# EAGLE board SparkFun_ACS712_Low_Current_Sensor_Panel_v14 (EAGLE 7.4.0), part 1 of 4
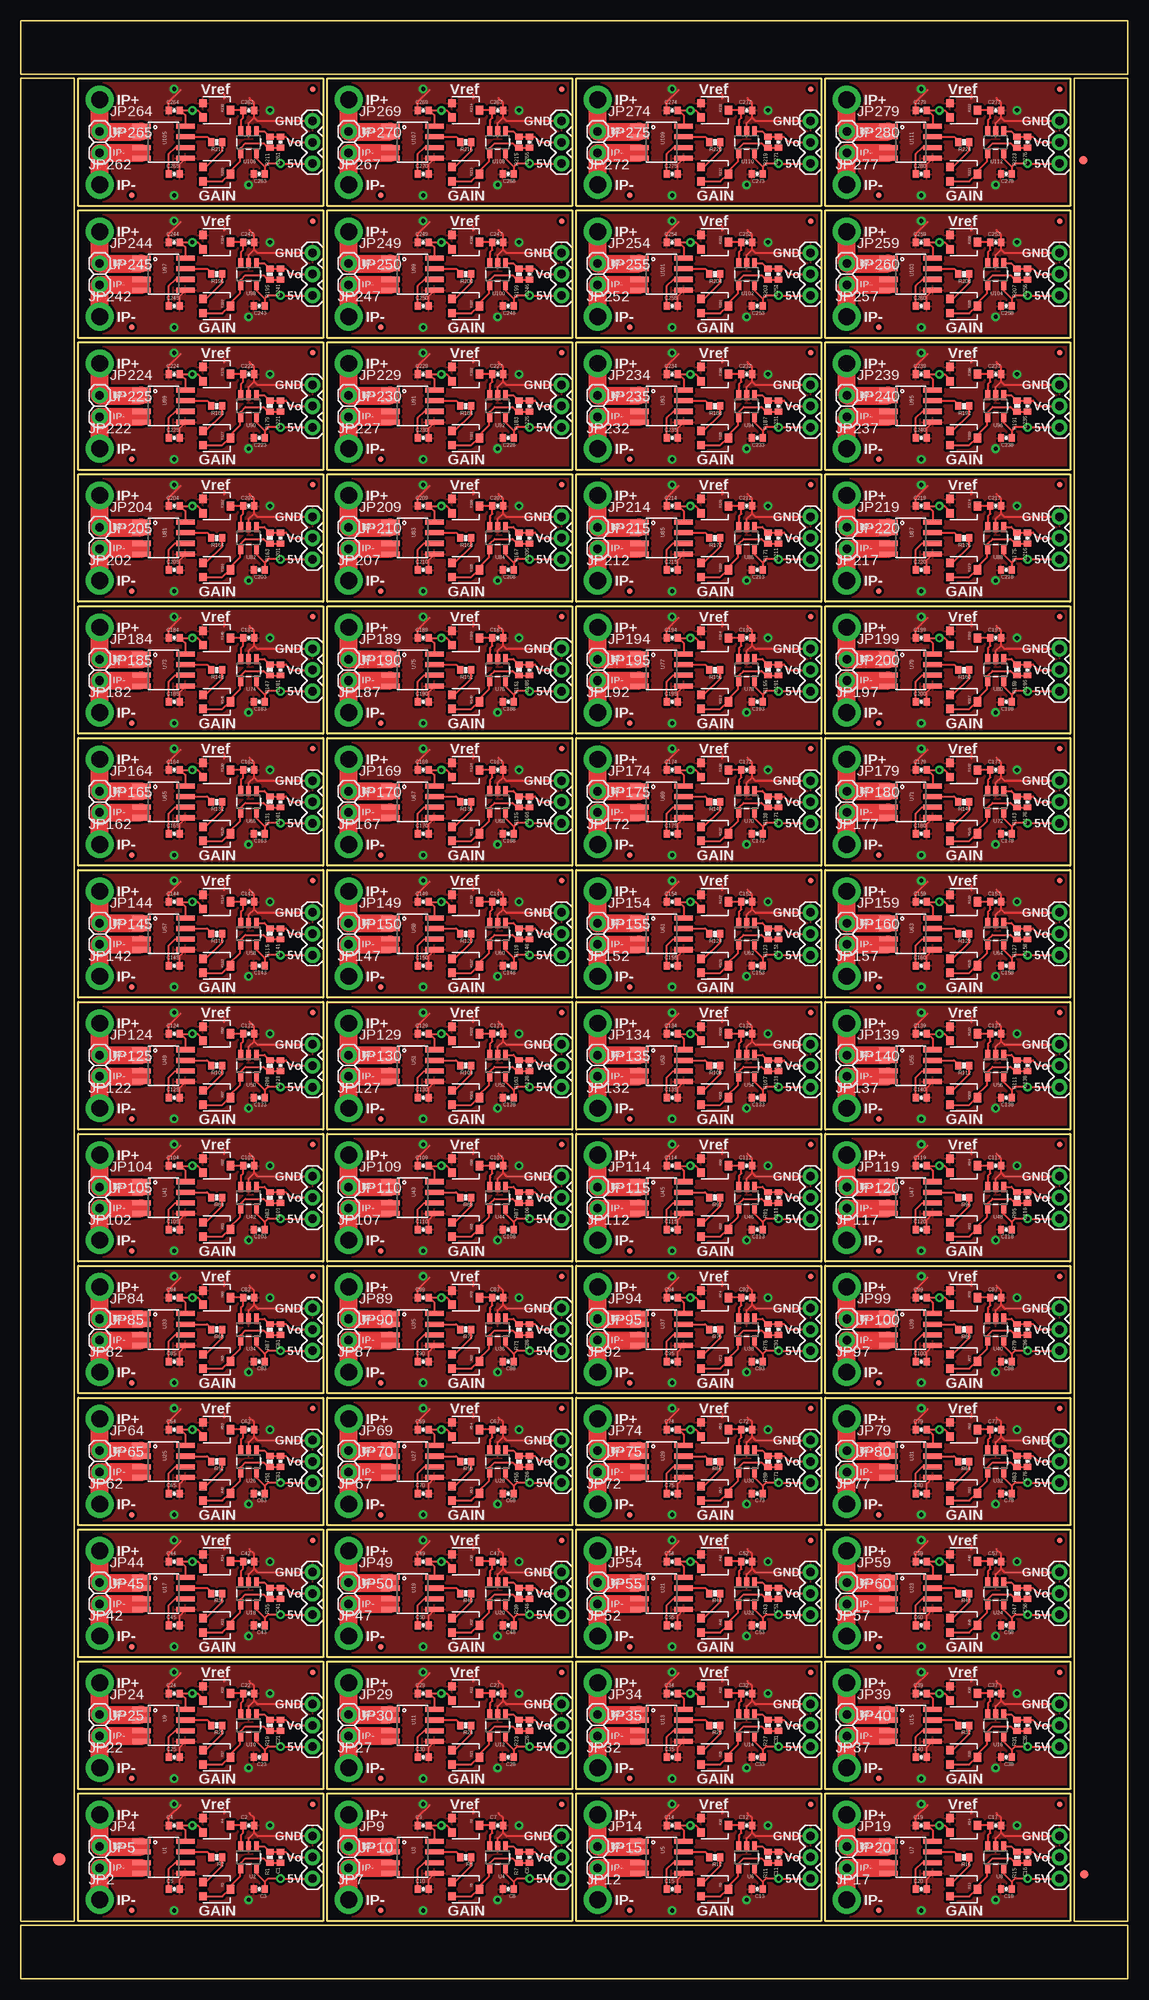
[diagram p0: board, top side]
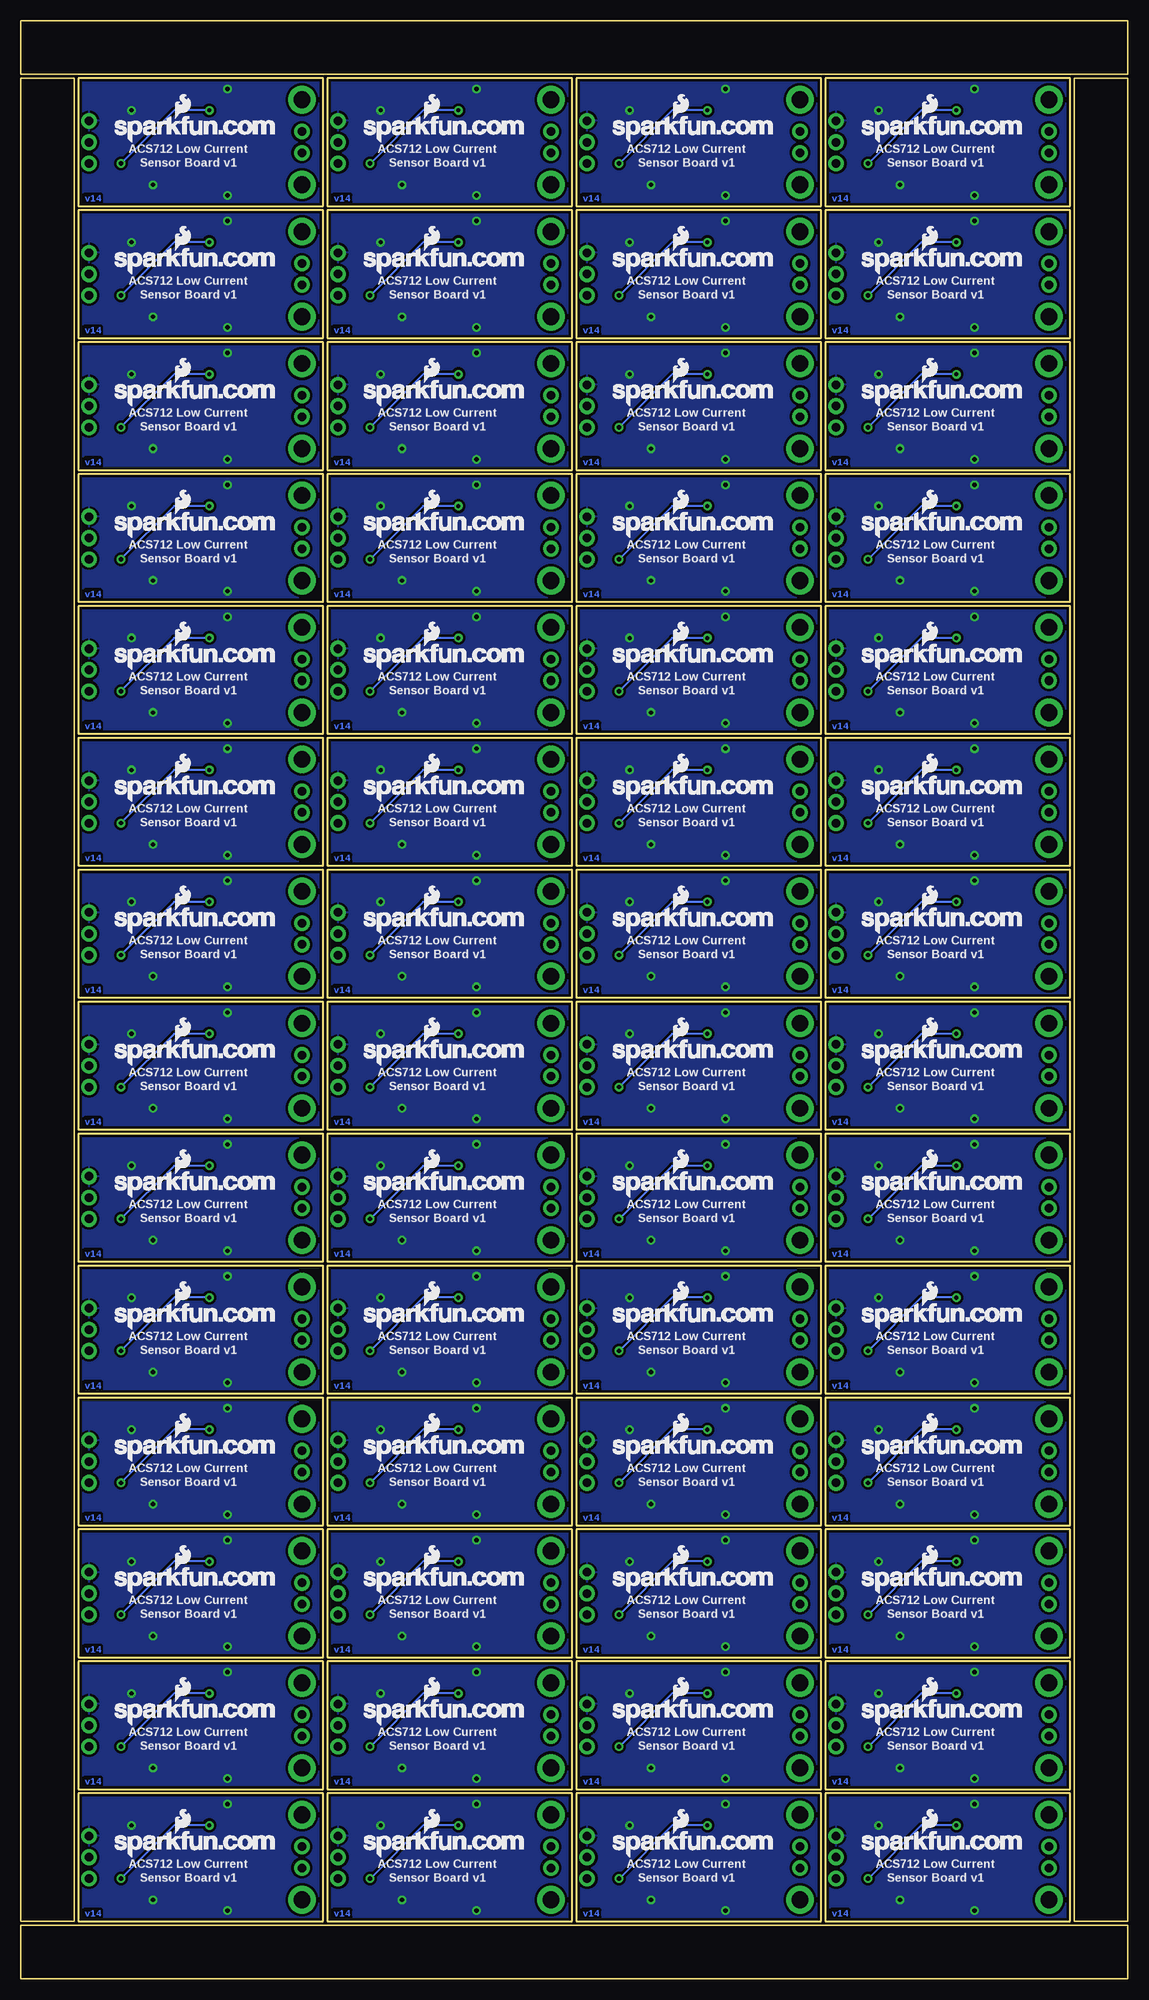
[diagram p1: board, bottom side, seen from below]

Size 132.08 x 233.68 mm. Coordinates in mm from the lower left corner, seen from the top.
Outline: 248 segments
Copper layers (1*16): Top 0.035mm / dielectric 1.5mm / Bottom 0.035mm
Design rules "default": minimum track width 8mil, minimum drill 20mil, track to track 8mil, track to pad 8mil, pad to pad 8mil, via to via 8mil, smd to smd 8mil, copper to edge 8mil, drill to drill 8mil, minimum pad ring 12mil, minimum via ring 10mil, stop-mask expansion 4mil, vias tented up to drill 20mil, thermal gap 10mil

## Footprints (pad centres in the part's own frame; a part is rotated, then mirrored left to right if it is on the bottom)
0402-CAP = smd 0.7 x 0.9: 1 -0.65,0; 2 0.65,0
FIDUCIAL-1.5X3 = smd 1.5 x 1.5: 1 0,0
FIDUCIAL-1X2 = smd 1 x 1: 1 0,0
1X01_2MM = drill 2 pad 3.302: 1 0,0
1X03 = drill 1.016 pad 1.88: 1 0,0; 2 2.54,0; 3 5.08,0
1X01 = drill 1.016 pad 1.88: 1 0,0
0402-RES = smd 0.7 x 0.9: 1 -0.65,0; 2 0.65,0
TRIMPOT-3MM = smd 1 x 0.9: 1 -0.85,-1.65; 3 0.85,-1.65 | smd 1.1 x 0.9: 2 0,1.65
SO08 = smd 0.61 x 2.21: 1 -1.905,-2.616; 2 -0.635,-2.616; 3 0.635,-2.616; 4 1.905,-2.616; 5 1.905,2.616; 6 0.635,2.616; 7 -0.635,2.616; 8 -1.905,2.616
SOT23-5 = smd 0.55 x 1.2: 1 -0.95,-1.3; 2 0,-1.3; 3 0.95,-1.3; 4 0.95,1.3; 5 -0.95,1.3
MICRO-FIDUCIAL = smd 0.635 x 0.635: 1 0,0

## Placement (x,y rotation side)
C1  0.1uF  [0402-CAP]  30.99,14.48 270 top
C2  0.1uF  [0402-CAP]  27.18,18.29 0 top
C3  0.1uF  [0402-CAP]  28.45,10.67 180 top
C4  0.1uF  [0402-CAP]  18.29,18.29 0 top
C5  1nF  [0402-CAP]  18.29,10.67 0 top
C6  0.1uF  [0402-CAP]  60.71,14.48 270 top
C7  0.1uF  [0402-CAP]  56.9,18.29 0 top
C8  0.1uF  [0402-CAP]  58.17,10.67 180 top
C9  0.1uF  [0402-CAP]  48.01,18.29 0 top
C10  1nF  [0402-CAP]  48.01,10.67 0 top
C11  0.1uF  [0402-CAP]  90.42,14.48 270 top
C12  0.1uF  [0402-CAP]  86.61,18.29 0 top
C13  0.1uF  [0402-CAP]  87.88,10.67 180 top
C14  0.1uF  [0402-CAP]  77.72,18.29 0 top
C15  1nF  [0402-CAP]  77.72,10.67 0 top
C16  0.1uF  [0402-CAP]  120.14,14.48 270 top
C17  0.1uF  [0402-CAP]  116.33,18.29 0 top
C18  0.1uF  [0402-CAP]  117.6,10.67 180 top
C19  0.1uF  [0402-CAP]  107.44,18.29 0 top
C20  1nF  [0402-CAP]  107.44,10.67 0 top
C21  0.1uF  [0402-CAP]  30.99,30.23 270 top
C22  0.1uF  [0402-CAP]  27.18,34.04 0 top
C23  0.1uF  [0402-CAP]  28.45,26.42 180 top
C24  0.1uF  [0402-CAP]  18.29,34.04 0 top
C25  1nF  [0402-CAP]  18.29,26.42 0 top
C26  0.1uF  [0402-CAP]  60.71,30.23 270 top
C27  0.1uF  [0402-CAP]  56.9,34.04 0 top
C28  0.1uF  [0402-CAP]  58.17,26.42 180 top
C29  0.1uF  [0402-CAP]  48.01,34.04 0 top
C30  1nF  [0402-CAP]  48.01,26.42 0 top
C31  0.1uF  [0402-CAP]  90.42,30.23 270 top
C32  0.1uF  [0402-CAP]  86.61,34.04 0 top
C33  0.1uF  [0402-CAP]  87.88,26.42 180 top
C34  0.1uF  [0402-CAP]  77.72,34.04 0 top
C35  1nF  [0402-CAP]  77.72,26.42 0 top
C36  0.1uF  [0402-CAP]  120.14,30.23 270 top
C37  0.1uF  [0402-CAP]  116.33,34.04 0 top
C38  0.1uF  [0402-CAP]  117.6,26.42 180 top
C39  0.1uF  [0402-CAP]  107.44,34.04 0 top
C40  1nF  [0402-CAP]  107.44,26.42 0 top
C41  0.1uF  [0402-CAP]  30.99,45.97 270 top
C42  0.1uF  [0402-CAP]  27.18,49.78 0 top
C43  0.1uF  [0402-CAP]  28.45,42.16 180 top
C44  0.1uF  [0402-CAP]  18.29,49.78 0 top
C45  1nF  [0402-CAP]  18.29,42.16 0 top
C46  0.1uF  [0402-CAP]  60.71,45.97 270 top
C47  0.1uF  [0402-CAP]  56.9,49.78 0 top
C48  0.1uF  [0402-CAP]  58.17,42.16 180 top
C49  0.1uF  [0402-CAP]  48.01,49.78 0 top
C50  1nF  [0402-CAP]  48.01,42.16 0 top
C51  0.1uF  [0402-CAP]  90.42,45.97 270 top
C52  0.1uF  [0402-CAP]  86.61,49.78 0 top
C53  0.1uF  [0402-CAP]  87.88,42.16 180 top
C54  0.1uF  [0402-CAP]  77.72,49.78 0 top
C55  1nF  [0402-CAP]  77.72,42.16 0 top
C56  0.1uF  [0402-CAP]  120.14,45.97 270 top
C57  0.1uF  [0402-CAP]  116.33,49.78 0 top
C58  0.1uF  [0402-CAP]  117.6,42.16 180 top
C59  0.1uF  [0402-CAP]  107.44,49.78 0 top
C60  1nF  [0402-CAP]  107.44,42.16 0 top
C61  0.1uF  [0402-CAP]  30.99,61.72 270 top
C62  0.1uF  [0402-CAP]  27.18,65.53 0 top
C63  0.1uF  [0402-CAP]  28.45,57.91 180 top
C64  0.1uF  [0402-CAP]  18.29,65.53 0 top
C65  1nF  [0402-CAP]  18.29,57.91 0 top
C66  0.1uF  [0402-CAP]  60.71,61.72 270 top
C67  0.1uF  [0402-CAP]  56.9,65.53 0 top
C68  0.1uF  [0402-CAP]  58.17,57.91 180 top
C69  0.1uF  [0402-CAP]  48.01,65.53 0 top
C70  1nF  [0402-CAP]  48.01,57.91 0 top
C71  0.1uF  [0402-CAP]  90.42,61.72 270 top
C72  0.1uF  [0402-CAP]  86.61,65.53 0 top
C73  0.1uF  [0402-CAP]  87.88,57.91 180 top
C74  0.1uF  [0402-CAP]  77.72,65.53 0 top
C75  1nF  [0402-CAP]  77.72,57.91 0 top
C76  0.1uF  [0402-CAP]  120.14,61.72 270 top
C77  0.1uF  [0402-CAP]  116.33,65.53 0 top
C78  0.1uF  [0402-CAP]  117.6,57.91 180 top
C79  0.1uF  [0402-CAP]  107.44,65.53 0 top
C80  1nF  [0402-CAP]  107.44,57.91 0 top
C81  0.1uF  [0402-CAP]  30.99,77.47 270 top
C82  0.1uF  [0402-CAP]  27.18,81.28 0 top
C83  0.1uF  [0402-CAP]  28.45,73.66 180 top
C84  0.1uF  [0402-CAP]  18.29,81.28 0 top
C85  1nF  [0402-CAP]  18.29,73.66 0 top
C86  0.1uF  [0402-CAP]  60.71,77.47 270 top
C87  0.1uF  [0402-CAP]  56.9,81.28 0 top
C88  0.1uF  [0402-CAP]  58.17,73.66 180 top
C89  0.1uF  [0402-CAP]  48.01,81.28 0 top
C90  1nF  [0402-CAP]  48.01,73.66 0 top
C91  0.1uF  [0402-CAP]  90.42,77.47 270 top
C92  0.1uF  [0402-CAP]  86.61,81.28 0 top
C93  0.1uF  [0402-CAP]  87.88,73.66 180 top
C94  0.1uF  [0402-CAP]  77.72,81.28 0 top
C95  1nF  [0402-CAP]  77.72,73.66 0 top
C96  0.1uF  [0402-CAP]  120.14,77.47 270 top
C97  0.1uF  [0402-CAP]  116.33,81.28 0 top
C98  0.1uF  [0402-CAP]  117.6,73.66 180 top
C99  0.1uF  [0402-CAP]  107.44,81.28 0 top
C100  1nF  [0402-CAP]  107.44,73.66 0 top
C101  0.1uF  [0402-CAP]  30.99,93.22 270 top
C102  0.1uF  [0402-CAP]  27.18,97.03 0 top
C103  0.1uF  [0402-CAP]  28.45,89.41 180 top
C104  0.1uF  [0402-CAP]  18.29,97.03 0 top
C105  1nF  [0402-CAP]  18.29,89.41 0 top
C106  0.1uF  [0402-CAP]  60.71,93.22 270 top
C107  0.1uF  [0402-CAP]  56.9,97.03 0 top
C108  0.1uF  [0402-CAP]  58.17,89.41 180 top
C109  0.1uF  [0402-CAP]  48.01,97.03 0 top
C110  1nF  [0402-CAP]  48.01,89.41 0 top
C111  0.1uF  [0402-CAP]  90.42,93.22 270 top
C112  0.1uF  [0402-CAP]  86.61,97.03 0 top
C113  0.1uF  [0402-CAP]  87.88,89.41 180 top
C114  0.1uF  [0402-CAP]  77.72,97.03 0 top
C115  1nF  [0402-CAP]  77.72,89.41 0 top
C116  0.1uF  [0402-CAP]  120.14,93.22 270 top
C117  0.1uF  [0402-CAP]  116.33,97.03 0 top
C118  0.1uF  [0402-CAP]  117.6,89.41 180 top
C119  0.1uF  [0402-CAP]  107.44,97.03 0 top
C120  1nF  [0402-CAP]  107.44,89.41 0 top
C121  0.1uF  [0402-CAP]  30.99,108.97 270 top
C122  0.1uF  [0402-CAP]  27.18,112.78 0 top
C123  0.1uF  [0402-CAP]  28.45,105.16 180 top
C124  0.1uF  [0402-CAP]  18.29,112.78 0 top
C125  1nF  [0402-CAP]  18.29,105.16 0 top
C126  0.1uF  [0402-CAP]  60.71,108.97 270 top
C127  0.1uF  [0402-CAP]  56.9,112.78 0 top
C128  0.1uF  [0402-CAP]  58.17,105.16 180 top
C129  0.1uF  [0402-CAP]  48.01,112.78 0 top
C130  1nF  [0402-CAP]  48.01,105.16 0 top
C131  0.1uF  [0402-CAP]  90.42,108.97 270 top
C132  0.1uF  [0402-CAP]  86.61,112.78 0 top
C133  0.1uF  [0402-CAP]  87.88,105.16 180 top
C134  0.1uF  [0402-CAP]  77.72,112.78 0 top
C135  1nF  [0402-CAP]  77.72,105.16 0 top
C136  0.1uF  [0402-CAP]  120.14,108.97 270 top
C137  0.1uF  [0402-CAP]  116.33,112.78 0 top
C138  0.1uF  [0402-CAP]  117.6,105.16 180 top
C139  0.1uF  [0402-CAP]  107.44,112.78 0 top
C140  1nF  [0402-CAP]  107.44,105.16 0 top
C141  0.1uF  [0402-CAP]  30.99,124.71 270 top
C142  0.1uF  [0402-CAP]  27.18,128.52 0 top
C143  0.1uF  [0402-CAP]  28.45,120.9 180 top
C144  0.1uF  [0402-CAP]  18.29,128.52 0 top
C145  1nF  [0402-CAP]  18.29,120.9 0 top
C146  0.1uF  [0402-CAP]  60.71,124.71 270 top
C147  0.1uF  [0402-CAP]  56.9,128.52 0 top
C148  0.1uF  [0402-CAP]  58.17,120.9 180 top
C149  0.1uF  [0402-CAP]  48.01,128.52 0 top
C150  1nF  [0402-CAP]  48.01,120.9 0 top
C151  0.1uF  [0402-CAP]  90.42,124.71 270 top
C152  0.1uF  [0402-CAP]  86.61,128.52 0 top
C153  0.1uF  [0402-CAP]  87.88,120.9 180 top
C154  0.1uF  [0402-CAP]  77.72,128.52 0 top
C155  1nF  [0402-CAP]  77.72,120.9 0 top
C156  0.1uF  [0402-CAP]  120.14,124.71 270 top
C157  0.1uF  [0402-CAP]  116.33,128.52 0 top
C158  0.1uF  [0402-CAP]  117.6,120.9 180 top
C159  0.1uF  [0402-CAP]  107.44,128.52 0 top
C160  1nF  [0402-CAP]  107.44,120.9 0 top
C161  0.1uF  [0402-CAP]  30.99,140.46 270 top
C162  0.1uF  [0402-CAP]  27.18,144.27 0 top
C163  0.1uF  [0402-CAP]  28.45,136.65 180 top
C164  0.1uF  [0402-CAP]  18.29,144.27 0 top
C165  1nF  [0402-CAP]  18.29,136.65 0 top
C166  0.1uF  [0402-CAP]  60.71,140.46 270 top
C167  0.1uF  [0402-CAP]  56.9,144.27 0 top
C168  0.1uF  [0402-CAP]  58.17,136.65 180 top
C169  0.1uF  [0402-CAP]  48.01,144.27 0 top
C170  1nF  [0402-CAP]  48.01,136.65 0 top
C171  0.1uF  [0402-CAP]  90.42,140.46 270 top
C172  0.1uF  [0402-CAP]  86.61,144.27 0 top
C173  0.1uF  [0402-CAP]  87.88,136.65 180 top
C174  0.1uF  [0402-CAP]  77.72,144.27 0 top
C175  1nF  [0402-CAP]  77.72,136.65 0 top
C176  0.1uF  [0402-CAP]  120.14,140.46 270 top
C177  0.1uF  [0402-CAP]  116.33,144.27 0 top
C178  0.1uF  [0402-CAP]  117.6,136.65 180 top
C179  0.1uF  [0402-CAP]  107.44,144.27 0 top
C180  1nF  [0402-CAP]  107.44,136.65 0 top
C181  0.1uF  [0402-CAP]  30.99,156.21 270 top
C182  0.1uF  [0402-CAP]  27.18,160.02 0 top
C183  0.1uF  [0402-CAP]  28.45,152.4 180 top
C184  0.1uF  [0402-CAP]  18.29,160.02 0 top
C185  1nF  [0402-CAP]  18.29,152.4 0 top
C186  0.1uF  [0402-CAP]  60.71,156.21 270 top
C187  0.1uF  [0402-CAP]  56.9,160.02 0 top
C188  0.1uF  [0402-CAP]  58.17,152.4 180 top
C189  0.1uF  [0402-CAP]  48.01,160.02 0 top
C190  1nF  [0402-CAP]  48.01,152.4 0 top
C191  0.1uF  [0402-CAP]  90.42,156.21 270 top
C192  0.1uF  [0402-CAP]  86.61,160.02 0 top
C193  0.1uF  [0402-CAP]  87.88,152.4 180 top
C194  0.1uF  [0402-CAP]  77.72,160.02 0 top
C195  1nF  [0402-CAP]  77.72,152.4 0 top
C196  0.1uF  [0402-CAP]  120.14,156.21 270 top
C197  0.1uF  [0402-CAP]  116.33,160.02 0 top
C198  0.1uF  [0402-CAP]  117.6,152.4 180 top
C199  0.1uF  [0402-CAP]  107.44,160.02 0 top
C200  1nF  [0402-CAP]  107.44,152.4 0 top
C201  0.1uF  [0402-CAP]  30.99,171.96 270 top
C202  0.1uF  [0402-CAP]  27.18,175.77 0 top
C203  0.1uF  [0402-CAP]  28.45,168.15 180 top
C204  0.1uF  [0402-CAP]  18.29,175.77 0 top
C205  1nF  [0402-CAP]  18.29,168.15 0 top
C206  0.1uF  [0402-CAP]  60.71,171.96 270 top
C207  0.1uF  [0402-CAP]  56.9,175.77 0 top
C208  0.1uF  [0402-CAP]  58.17,168.15 180 top
C209  0.1uF  [0402-CAP]  48.01,175.77 0 top
C210  1nF  [0402-CAP]  48.01,168.15 0 top
C211  0.1uF  [0402-CAP]  90.42,171.96 270 top
C212  0.1uF  [0402-CAP]  86.61,175.77 0 top
C213  0.1uF  [0402-CAP]  87.88,168.15 180 top
C214  0.1uF  [0402-CAP]  77.72,175.77 0 top
C215  1nF  [0402-CAP]  77.72,168.15 0 top
C216  0.1uF  [0402-CAP]  120.14,171.96 270 top
C217  0.1uF  [0402-CAP]  116.33,175.77 0 top
C218  0.1uF  [0402-CAP]  117.6,168.15 180 top
C219  0.1uF  [0402-CAP]  107.44,175.77 0 top
C220  1nF  [0402-CAP]  107.44,168.15 0 top
C221  0.1uF  [0402-CAP]  30.99,187.71 270 top
C222  0.1uF  [0402-CAP]  27.18,191.52 0 top
C223  0.1uF  [0402-CAP]  28.45,183.9 180 top
C224  0.1uF  [0402-CAP]  18.29,191.52 0 top
C225  1nF  [0402-CAP]  18.29,183.9 0 top
C226  0.1uF  [0402-CAP]  60.71,187.71 270 top
C227  0.1uF  [0402-CAP]  56.9,191.52 0 top
C228  0.1uF  [0402-CAP]  58.17,183.9 180 top
C229  0.1uF  [0402-CAP]  48.01,191.52 0 top
C230  1nF  [0402-CAP]  48.01,183.9 0 top
C231  0.1uF  [0402-CAP]  90.42,187.71 270 top
C232  0.1uF  [0402-CAP]  86.61,191.52 0 top
C233  0.1uF  [0402-CAP]  87.88,183.9 180 top
C234  0.1uF  [0402-CAP]  77.72,191.52 0 top
C235  1nF  [0402-CAP]  77.72,183.9 0 top
C236  0.1uF  [0402-CAP]  120.14,187.71 270 top
C237  0.1uF  [0402-CAP]  116.33,191.52 0 top
C238  0.1uF  [0402-CAP]  117.6,183.9 180 top
C239  0.1uF  [0402-CAP]  107.44,191.52 0 top
C240  1nF  [0402-CAP]  107.44,183.9 0 top
C241  0.1uF  [0402-CAP]  30.99,203.45 270 top
C242  0.1uF  [0402-CAP]  27.18,207.26 0 top
C243  0.1uF  [0402-CAP]  28.45,199.64 180 top
C244  0.1uF  [0402-CAP]  18.29,207.26 0 top
C245  1nF  [0402-CAP]  18.29,199.64 0 top
C246  0.1uF  [0402-CAP]  60.71,203.45 270 top
C247  0.1uF  [0402-CAP]  56.9,207.26 0 top
C248  0.1uF  [0402-CAP]  58.17,199.64 180 top
C249  0.1uF  [0402-CAP]  48.01,207.26 0 top
C250  1nF  [0402-CAP]  48.01,199.64 0 top
C251  0.1uF  [0402-CAP]  90.42,203.45 270 top
C252  0.1uF  [0402-CAP]  86.61,207.26 0 top
C253  0.1uF  [0402-CAP]  87.88,199.64 180 top
C254  0.1uF  [0402-CAP]  77.72,207.26 0 top
C255  1nF  [0402-CAP]  77.72,199.64 0 top
C256  0.1uF  [0402-CAP]  120.14,203.45 270 top
C257  0.1uF  [0402-CAP]  116.33,207.26 0 top
C258  0.1uF  [0402-CAP]  117.6,199.64 180 top
C259  0.1uF  [0402-CAP]  107.44,207.26 0 top
C260  1nF  [0402-CAP]  107.44,199.64 0 top
C261  0.1uF  [0402-CAP]  30.99,219.2 270 top
C262  0.1uF  [0402-CAP]  27.18,223.01 0 top
C263  0.1uF  [0402-CAP]  28.45,215.39 180 top
C264  0.1uF  [0402-CAP]  18.29,223.01 0 top
C265  1nF  [0402-CAP]  18.29,215.39 0 top
C266  0.1uF  [0402-CAP]  60.71,219.2 270 top
C267  0.1uF  [0402-CAP]  56.9,223.01 0 top
C268  0.1uF  [0402-CAP]  58.17,215.39 180 top
C269  0.1uF  [0402-CAP]  48.01,223.01 0 top
C270  1nF  [0402-CAP]  48.01,215.39 0 top
C271  0.1uF  [0402-CAP]  90.42,219.2 270 top
C272  0.1uF  [0402-CAP]  86.61,223.01 0 top
C273  0.1uF  [0402-CAP]  87.88,215.39 180 top
C274  0.1uF  [0402-CAP]  77.72,223.01 0 top
C275  1nF  [0402-CAP]  77.72,215.39 0 top
C276  0.1uF  [0402-CAP]  120.14,219.2 270 top
C277  0.1uF  [0402-CAP]  116.33,223.01 0 top
C278  0.1uF  [0402-CAP]  117.6,215.39 180 top
C279  0.1uF  [0402-CAP]  107.44,223.01 0 top
C280  1nF  [0402-CAP]  107.44,215.39 0 top
E$1  [FIDUCIAL-1.5X3]  4.57,14.22 0 top
E$5  [FIDUCIAL-1X2]  126.87,12.45 0 top
E$7  [FIDUCIAL-1X2]  126.75,217.04 90 top
JP1  M01PTH_2MM  [1X01_2MM]  9.4,19.56 0 top
JP2  M01PTH_2MM  [1X01_2MM]  9.4,9.4 0 top
JP3  [1X03]  34.8,11.94 90 top
JP4  M01PTH  [1X01]  9.4,15.75 0 top
JP5  M01PTH  [1X01]  9.4,13.21 0 top
JP6  M01PTH_2MM  [1X01_2MM]  39.12,19.56 0 top
JP7  M01PTH_2MM  [1X01_2MM]  39.12,9.4 0 top
JP8  [1X03]  64.52,11.94 90 top
JP9  M01PTH  [1X01]  39.12,15.75 0 top
JP10  M01PTH  [1X01]  39.12,13.21 0 top
JP11  M01PTH_2MM  [1X01_2MM]  68.83,19.56 0 top
JP12  M01PTH_2MM  [1X01_2MM]  68.83,9.4 0 top
JP13  [1X03]  94.23,11.94 90 top
JP14  M01PTH  [1X01]  68.83,15.75 0 top
JP15  M01PTH  [1X01]  68.83,13.21 0 top
JP16  M01PTH_2MM  [1X01_2MM]  98.55,19.56 0 top
JP17  M01PTH_2MM  [1X01_2MM]  98.55,9.4 0 top
JP18  [1X03]  123.95,11.94 90 top
JP19  M01PTH  [1X01]  98.55,15.75 0 top
JP20  M01PTH  [1X01]  98.55,13.21 0 top
JP21  M01PTH_2MM  [1X01_2MM]  9.4,35.31 0 top
JP22  M01PTH_2MM  [1X01_2MM]  9.4,25.15 0 top
JP23  [1X03]  34.8,27.69 90 top
JP24  M01PTH  [1X01]  9.4,31.5 0 top
JP25  M01PTH  [1X01]  9.4,28.96 0 top
JP26  M01PTH_2MM  [1X01_2MM]  39.12,35.31 0 top
JP27  M01PTH_2MM  [1X01_2MM]  39.12,25.15 0 top
JP28  [1X03]  64.52,27.69 90 top
JP29  M01PTH  [1X01]  39.12,31.5 0 top
JP30  M01PTH  [1X01]  39.12,28.96 0 top
JP31  M01PTH_2MM  [1X01_2MM]  68.83,35.31 0 top
JP32  M01PTH_2MM  [1X01_2MM]  68.83,25.15 0 top
JP33  [1X03]  94.23,27.69 90 top
JP34  M01PTH  [1X01]  68.83,31.5 0 top
JP35  M01PTH  [1X01]  68.83,28.96 0 top
JP36  M01PTH_2MM  [1X01_2MM]  98.55,35.31 0 top
JP37  M01PTH_2MM  [1X01_2MM]  98.55,25.15 0 top
JP38  [1X03]  123.95,27.69 90 top
JP39  M01PTH  [1X01]  98.55,31.5 0 top
JP40  M01PTH  [1X01]  98.55,28.96 0 top
JP41  M01PTH_2MM  [1X01_2MM]  9.4,51.05 0 top
JP42  M01PTH_2MM  [1X01_2MM]  9.4,40.89 0 top
JP43  [1X03]  34.8,43.43 90 top
JP44  M01PTH  [1X01]  9.4,47.24 0 top
JP45  M01PTH  [1X01]  9.4,44.7 0 top
JP46  M01PTH_2MM  [1X01_2MM]  39.12,51.05 0 top
JP47  M01PTH_2MM  [1X01_2MM]  39.12,40.89 0 top
JP48  [1X03]  64.52,43.43 90 top
JP49  M01PTH  [1X01]  39.12,47.24 0 top
JP50  M01PTH  [1X01]  39.12,44.7 0 top
JP51  M01PTH_2MM  [1X01_2MM]  68.83,51.05 0 top
JP52  M01PTH_2MM  [1X01_2MM]  68.83,40.89 0 top
JP53  [1X03]  94.23,43.43 90 top
JP54  M01PTH  [1X01]  68.83,47.24 0 top
JP55  M01PTH  [1X01]  68.83,44.7 0 top
JP56  M01PTH_2MM  [1X01_2MM]  98.55,51.05 0 top
JP57  M01PTH_2MM  [1X01_2MM]  98.55,40.89 0 top
JP58  [1X03]  123.95,43.43 90 top
JP59  M01PTH  [1X01]  98.55,47.24 0 top
JP60  M01PTH  [1X01]  98.55,44.7 0 top
JP61  M01PTH_2MM  [1X01_2MM]  9.4,66.8 0 top
JP62  M01PTH_2MM  [1X01_2MM]  9.4,56.64 0 top
JP63  [1X03]  34.8,59.18 90 top
JP64  M01PTH  [1X01]  9.4,62.99 0 top
JP65  M01PTH  [1X01]  9.4,60.45 0 top
JP66  M01PTH_2MM  [1X01_2MM]  39.12,66.8 0 top
JP67  M01PTH_2MM  [1X01_2MM]  39.12,56.64 0 top
JP68  [1X03]  64.52,59.18 90 top
JP69  M01PTH  [1X01]  39.12,62.99 0 top
JP70  M01PTH  [1X01]  39.12,60.45 0 top
JP71  M01PTH_2MM  [1X01_2MM]  68.83,66.8 0 top
JP72  M01PTH_2MM  [1X01_2MM]  68.83,56.64 0 top
JP73  [1X03]  94.23,59.18 90 top
JP74  M01PTH  [1X01]  68.83,62.99 0 top
JP75  M01PTH  [1X01]  68.83,60.45 0 top
JP76  M01PTH_2MM  [1X01_2MM]  98.55,66.8 0 top
JP77  M01PTH_2MM  [1X01_2MM]  98.55,56.64 0 top
JP78  [1X03]  123.95,59.18 90 top
JP79  M01PTH  [1X01]  98.55,62.99 0 top
JP80  M01PTH  [1X01]  98.55,60.45 0 top
JP81  M01PTH_2MM  [1X01_2MM]  9.4,82.55 0 top
JP82  M01PTH_2MM  [1X01_2MM]  9.4,72.39 0 top
JP83  [1X03]  34.8,74.93 90 top
JP84  M01PTH  [1X01]  9.4,78.74 0 top
JP85  M01PTH  [1X01]  9.4,76.2 0 top
JP86  M01PTH_2MM  [1X01_2MM]  39.12,82.55 0 top
JP87  M01PTH_2MM  [1X01_2MM]  39.12,72.39 0 top
JP88  [1X03]  64.52,74.93 90 top
JP89  M01PTH  [1X01]  39.12,78.74 0 top
JP90  M01PTH  [1X01]  39.12,76.2 0 top
JP91  M01PTH_2MM  [1X01_2MM]  68.83,82.55 0 top
JP92  M01PTH_2MM  [1X01_2MM]  68.83,72.39 0 top
JP93  [1X03]  94.23,74.93 90 top
JP94  M01PTH  [1X01]  68.83,78.74 0 top
JP95  M01PTH  [1X01]  68.83,76.2 0 top
JP96  M01PTH_2MM  [1X01_2MM]  98.55,82.55 0 top
JP97  M01PTH_2MM  [1X01_2MM]  98.55,72.39 0 top
JP98  [1X03]  123.95,74.93 90 top
JP99  M01PTH  [1X01]  98.55,78.74 0 top
JP100  M01PTH  [1X01]  98.55,76.2 0 top
JP101  M01PTH_2MM  [1X01_2MM]  9.4,98.3 0 top
JP102  M01PTH_2MM  [1X01_2MM]  9.4,88.14 0 top
JP103  [1X03]  34.8,90.68 90 top
JP104  M01PTH  [1X01]  9.4,94.49 0 top
JP105  M01PTH  [1X01]  9.4,91.95 0 top
JP106  M01PTH_2MM  [1X01_2MM]  39.12,98.3 0 top
JP107  M01PTH_2MM  [1X01_2MM]  39.12,88.14 0 top
JP108  [1X03]  64.52,90.68 90 top
JP109  M01PTH  [1X01]  39.12,94.49 0 top
JP110  M01PTH  [1X01]  39.12,91.95 0 top
JP111  M01PTH_2MM  [1X01_2MM]  68.83,98.3 0 top
JP112  M01PTH_2MM  [1X01_2MM]  68.83,88.14 0 top
JP113  [1X03]  94.23,90.68 90 top
JP114  M01PTH  [1X01]  68.83,94.49 0 top
JP115  M01PTH  [1X01]  68.83,91.95 0 top
JP116  M01PTH_2MM  [1X01_2MM]  98.55,98.3 0 top
JP117  M01PTH_2MM  [1X01_2MM]  98.55,88.14 0 top
JP118  [1X03]  123.95,90.68 90 top
JP119  M01PTH  [1X01]  98.55,94.49 0 top
JP120  M01PTH  [1X01]  98.55,91.95 0 top
JP121  M01PTH_2MM  [1X01_2MM]  9.4,114.05 0 top
JP122  M01PTH_2MM  [1X01_2MM]  9.4,103.89 0 top
JP123  [1X03]  34.8,106.43 90 top
JP124  M01PTH  [1X01]  9.4,110.24 0 top
JP125  M01PTH  [1X01]  9.4,107.7 0 top
JP126  M01PTH_2MM  [1X01_2MM]  39.12,114.05 0 top
JP127  M01PTH_2MM  [1X01_2MM]  39.12,103.89 0 top
JP128  [1X03]  64.52,106.43 90 top
JP129  M01PTH  [1X01]  39.12,110.24 0 top
JP130  M01PTH  [1X01]  39.12,107.7 0 top
JP131  M01PTH_2MM  [1X01_2MM]  68.83,114.05 0 top
JP132  M01PTH_2MM  [1X01_2MM]  68.83,103.89 0 top
JP133  [1X03]  94.23,106.43 90 top
JP134  M01PTH  [1X01]  68.83,110.24 0 top
JP135  M01PTH  [1X01]  68.83,107.7 0 top
JP136  M01PTH_2MM  [1X01_2MM]  98.55,114.05 0 top
JP137  M01PTH_2MM  [1X01_2MM]  98.55,103.89 0 top
JP138  [1X03]  123.95,106.43 90 top
JP139  M01PTH  [1X01]  98.55,110.24 0 top
JP140  M01PTH  [1X01]  98.55,107.7 0 top
JP141  M01PTH_2MM  [1X01_2MM]  9.4,129.79 0 top
JP142  M01PTH_2MM  [1X01_2MM]  9.4,119.63 0 top
JP143  [1X03]  34.8,122.17 90 top
JP144  M01PTH  [1X01]  9.4,125.98 0 top
JP145  M01PTH  [1X01]  9.4,123.44 0 top
JP146  M01PTH_2MM  [1X01_2MM]  39.12,129.79 0 top
JP147  M01PTH_2MM  [1X01_2MM]  39.12,119.63 0 top
JP148  [1X03]  64.52,122.17 90 top
JP149  M01PTH  [1X01]  39.12,125.98 0 top
JP150  M01PTH  [1X01]  39.12,123.44 0 top
JP151  M01PTH_2MM  [1X01_2MM]  68.83,129.79 0 top
JP152  M01PTH_2MM  [1X01_2MM]  68.83,119.63 0 top
JP153  [1X03]  94.23,122.17 90 top
JP154  M01PTH  [1X01]  68.83,125.98 0 top
JP155  M01PTH  [1X01]  68.83,123.44 0 top
JP156  M01PTH_2MM  [1X01_2MM]  98.55,129.79 0 top
JP157  M01PTH_2MM  [1X01_2MM]  98.55,119.63 0 top
JP158  [1X03]  123.95,122.17 90 top
JP159  M01PTH  [1X01]  98.55,125.98 0 top
JP160  M01PTH  [1X01]  98.55,123.44 0 top
JP161  M01PTH_2MM  [1X01_2MM]  9.4,145.54 0 top
JP162  M01PTH_2MM  [1X01_2MM]  9.4,135.38 0 top
JP163  [1X03]  34.8,137.92 90 top
JP164  M01PTH  [1X01]  9.4,141.73 0 top
JP165  M01PTH  [1X01]  9.4,139.19 0 top
JP166  M01PTH_2MM  [1X01_2MM]  39.12,145.54 0 top
JP167  M01PTH_2MM  [1X01_2MM]  39.12,135.38 0 top
JP168  [1X03]  64.52,137.92 90 top
JP169  M01PTH  [1X01]  39.12,141.73 0 top
JP170  M01PTH  [1X01]  39.12,139.19 0 top
JP171  M01PTH_2MM  [1X01_2MM]  68.83,145.54 0 top
JP172  M01PTH_2MM  [1X01_2MM]  68.83,135.38 0 top
JP173  [1X03]  94.23,137.92 90 top
JP174  M01PTH  [1X01]  68.83,141.73 0 top
JP175  M01PTH  [1X01]  68.83,139.19 0 top
JP176  M01PTH_2MM  [1X01_2MM]  98.55,145.54 0 top
JP177  M01PTH_2MM  [1X01_2MM]  98.55,135.38 0 top
JP178  [1X03]  123.95,137.92 90 top
JP179  M01PTH  [1X01]  98.55,141.73 0 top
JP180  M01PTH  [1X01]  98.55,139.19 0 top
JP181  M01PTH_2MM  [1X01_2MM]  9.4,161.29 0 top
JP182  M01PTH_2MM  [1X01_2MM]  9.4,151.13 0 top
JP183  [1X03]  34.8,153.67 90 top
JP184  M01PTH  [1X01]  9.4,157.48 0 top
JP185  M01PTH  [1X01]  9.4,154.94 0 top
JP186  M01PTH_2MM  [1X01_2MM]  39.12,161.29 0 top
JP187  M01PTH_2MM  [1X01_2MM]  39.12,151.13 0 top
JP188  [1X03]  64.52,153.67 90 top
JP189  M01PTH  [1X01]  39.12,157.48 0 top
JP190  M01PTH  [1X01]  39.12,154.94 0 top
JP191  M01PTH_2MM  [1X01_2MM]  68.83,161.29 0 top
JP192  M01PTH_2MM  [1X01_2MM]  68.83,151.13 0 top
JP193  [1X03]  94.23,153.67 90 top
JP194  M01PTH  [1X01]  68.83,157.48 0 top
JP195  M01PTH  [1X01]  68.83,154.94 0 top
JP196  M01PTH_2MM  [1X01_2MM]  98.55,161.29 0 top
JP197  M01PTH_2MM  [1X01_2MM]  98.55,151.13 0 top
JP198  [1X03]  123.95,153.67 90 top
JP199  M01PTH  [1X01]  98.55,157.48 0 top
JP200  M01PTH  [1X01]  98.55,154.94 0 top
JP201  M01PTH_2MM  [1X01_2MM]  9.4,177.04 0 top
JP202  M01PTH_2MM  [1X01_2MM]  9.4,166.88 0 top
JP203  [1X03]  34.8,169.42 90 top
JP204  M01PTH  [1X01]  9.4,173.23 0 top
JP205  M01PTH  [1X01]  9.4,170.69 0 top
JP206  M01PTH_2MM  [1X01_2MM]  39.12,177.04 0 top
JP207  M01PTH_2MM  [1X01_2MM]  39.12,166.88 0 top
JP208  [1X03]  64.52,169.42 90 top
JP209  M01PTH  [1X01]  39.12,173.23 0 top
JP210  M01PTH  [1X01]  39.12,170.69 0 top
JP211  M01PTH_2MM  [1X01_2MM]  68.83,177.04 0 top
JP212  M01PTH_2MM  [1X01_2MM]  68.83,166.88 0 top
JP213  [1X03]  94.23,169.42 90 top
JP214  M01PTH  [1X01]  68.83,173.23 0 top
JP215  M01PTH  [1X01]  68.83,170.69 0 top
JP216  M01PTH_2MM  [1X01_2MM]  98.55,177.04 0 top
JP217  M01PTH_2MM  [1X01_2MM]  98.55,166.88 0 top
JP218  [1X03]  123.95,169.42 90 top
JP219  M01PTH  [1X01]  98.55,173.23 0 top
JP220  M01PTH  [1X01]  98.55,170.69 0 top
JP221  M01PTH_2MM  [1X01_2MM]  9.4,192.79 0 top
JP222  M01PTH_2MM  [1X01_2MM]  9.4,182.63 0 top
JP223  [1X03]  34.8,185.17 90 top
JP224  M01PTH  [1X01]  9.4,188.98 0 top
JP225  M01PTH  [1X01]  9.4,186.44 0 top
JP226  M01PTH_2MM  [1X01_2MM]  39.12,192.79 0 top
JP227  M01PTH_2MM  [1X01_2MM]  39.12,182.63 0 top
JP228  [1X03]  64.52,185.17 90 top
JP229  M01PTH  [1X01]  39.12,188.98 0 top
JP230  M01PTH  [1X01]  39.12,186.44 0 top
JP231  M01PTH_2MM  [1X01_2MM]  68.83,192.79 0 top
JP232  M01PTH_2MM  [1X01_2MM]  68.83,182.63 0 top
JP233  [1X03]  94.23,185.17 90 top
JP234  M01PTH  [1X01]  68.83,188.98 0 top
JP235  M01PTH  [1X01]  68.83,186.44 0 top
JP236  M01PTH_2MM  [1X01_2MM]  98.55,192.79 0 top
JP237  M01PTH_2MM  [1X01_2MM]  98.55,182.63 0 top
JP238  [1X03]  123.95,185.17 90 top
JP239  M01PTH  [1X01]  98.55,188.98 0 top
JP240  M01PTH  [1X01]  98.55,186.44 0 top
JP241  M01PTH_2MM  [1X01_2MM]  9.4,208.53 0 top
JP242  M01PTH_2MM  [1X01_2MM]  9.4,198.37 0 top
JP243  [1X03]  34.8,200.91 90 top
JP244  M01PTH  [1X01]  9.4,204.72 0 top
JP245  M01PTH  [1X01]  9.4,202.18 0 top
JP246  M01PTH_2MM  [1X01_2MM]  39.12,208.53 0 top
JP247  M01PTH_2MM  [1X01_2MM]  39.12,198.37 0 top
JP248  [1X03]  64.52,200.91 90 top
JP249  M01PTH  [1X01]  39.12,204.72 0 top
JP250  M01PTH  [1X01]  39.12,202.18 0 top
JP251  M01PTH_2MM  [1X01_2MM]  68.83,208.53 0 top
JP252  M01PTH_2MM  [1X01_2MM]  68.83,198.37 0 top
JP253  [1X03]  94.23,200.91 90 top
JP254  M01PTH  [1X01]  68.83,204.72 0 top
JP255  M01PTH  [1X01]  68.83,202.18 0 top
JP256  M01PTH_2MM  [1X01_2MM]  98.55,208.53 0 top
JP257  M01PTH_2MM  [1X01_2MM]  98.55,198.37 0 top
JP258  [1X03]  123.95,200.91 90 top
JP259  M01PTH  [1X01]  98.55,204.72 0 top
JP260  M01PTH  [1X01]  98.55,202.18 0 top
JP261  M01PTH_2MM  [1X01_2MM]  9.4,224.28 0 top
JP262  M01PTH_2MM  [1X01_2MM]  9.4,214.12 0 top
JP263  [1X03]  34.8,216.66 90 top
JP264  M01PTH  [1X01]  9.4,220.47 0 top
JP265  M01PTH  [1X01]  9.4,217.93 0 top
JP266  M01PTH_2MM  [1X01_2MM]  39.12,224.28 0 top
JP267  M01PTH_2MM  [1X01_2MM]  39.12,214.12 0 top
JP268  [1X03]  64.52,216.66 90 top
JP269  M01PTH  [1X01]  39.12,220.47 0 top
JP270  M01PTH  [1X01]  39.12,217.93 0 top
JP271  M01PTH_2MM  [1X01_2MM]  68.83,224.28 0 top
JP272  M01PTH_2MM  [1X01_2MM]  68.83,214.12 0 top
JP273  [1X03]  94.23,216.66 90 top
JP274  M01PTH  [1X01]  68.83,220.47 0 top
JP275  M01PTH  [1X01]  68.83,217.93 0 top
JP276  M01PTH_2MM  [1X01_2MM]  98.55,224.28 0 top
JP277  M01PTH_2MM  [1X01_2MM]  98.55,214.12 0 top
JP278  [1X03]  123.95,216.66 90 top
JP279  M01PTH  [1X01]  98.55,220.47 0 top
JP280  M01PTH  [1X01]  98.55,217.93 0 top
R1  47K  [0402-RES]  29.72,14.48 270 top
R2  1K  [0402-RES]  23.37,14.48 180 top
R3  TRIMPOTSMD  [TRIMPOT-3MM]  23.37,10.67 270 top
R4  TRIMPOTSMD  [TRIMPOT-3MM]  23.37,18.29 270 top
R5  TRIMPOTSMD  [TRIMPOT-3MM]  53.09,10.67 270 top
R6  TRIMPOTSMD  [TRIMPOT-3MM]  53.09,18.29 270 top
R7  47K  [0402-RES]  59.44,14.48 270 top
R8  1K  [0402-RES]  53.09,14.48 180 top
R9  TRIMPOTSMD  [TRIMPOT-3MM]  82.8,10.67 270 top
R10  TRIMPOTSMD  [TRIMPOT-3MM]  82.8,18.29 270 top
R11  47K  [0402-RES]  89.15,14.48 270 top
R12  1K  [0402-RES]  82.8,14.48 180 top
R13  TRIMPOTSMD  [TRIMPOT-3MM]  112.52,10.67 270 top
R14  TRIMPOTSMD  [TRIMPOT-3MM]  112.52,18.29 270 top
R15  47K  [0402-RES]  118.87,14.48 270 top
R16  1K  [0402-RES]  112.52,14.48 180 top
R17  TRIMPOTSMD  [TRIMPOT-3MM]  23.37,26.42 270 top
R18  TRIMPOTSMD  [TRIMPOT-3MM]  23.37,34.04 270 top
R19  47K  [0402-RES]  29.72,30.23 270 top
R20  1K  [0402-RES]  23.37,30.23 180 top
R21  TRIMPOTSMD  [TRIMPOT-3MM]  53.09,26.42 270 top
R22  TRIMPOTSMD  [TRIMPOT-3MM]  53.09,34.04 270 top
R23  47K  [0402-RES]  59.44,30.23 270 top
R24  1K  [0402-RES]  53.09,30.23 180 top
R25  TRIMPOTSMD  [TRIMPOT-3MM]  82.8,26.42 270 top
R26  TRIMPOTSMD  [TRIMPOT-3MM]  82.8,34.04 270 top
R27  47K  [0402-RES]  89.15,30.23 270 top
R28  1K  [0402-RES]  82.8,30.23 180 top
R29  TRIMPOTSMD  [TRIMPOT-3MM]  112.52,26.42 270 top
R30  TRIMPOTSMD  [TRIMPOT-3MM]  112.52,34.04 270 top
R31  47K  [0402-RES]  118.87,30.23 270 top
R32  1K  [0402-RES]  112.52,30.23 180 top
R33  TRIMPOTSMD  [TRIMPOT-3MM]  23.37,42.16 270 top
R34  TRIMPOTSMD  [TRIMPOT-3MM]  23.37,49.78 270 top
R35  47K  [0402-RES]  29.72,45.97 270 top
R36  1K  [0402-RES]  23.37,45.97 180 top
R37  TRIMPOTSMD  [TRIMPOT-3MM]  53.09,42.16 270 top
R38  TRIMPOTSMD  [TRIMPOT-3MM]  53.09,49.78 270 top
R39  47K  [0402-RES]  59.44,45.97 270 top
R40  1K  [0402-RES]  53.09,45.97 180 top
R41  TRIMPOTSMD  [TRIMPOT-3MM]  82.8,42.16 270 top
R42  TRIMPOTSMD  [TRIMPOT-3MM]  82.8,49.78 270 top
R43  47K  [0402-RES]  89.15,45.97 270 top
R44  1K  [0402-RES]  82.8,45.97 180 top
R45  TRIMPOTSMD  [TRIMPOT-3MM]  112.52,42.16 270 top
R46  TRIMPOTSMD  [TRIMPOT-3MM]  112.52,49.78 270 top
R47  47K  [0402-RES]  118.87,45.97 270 top
R48  1K  [0402-RES]  112.52,45.97 180 top
R49  TRIMPOTSMD  [TRIMPOT-3MM]  23.37,57.91 270 top
R50  TRIMPOTSMD  [TRIMPOT-3MM]  23.37,65.53 270 top
R51  47K  [0402-RES]  29.72,61.72 270 top
R52  1K  [0402-RES]  23.37,61.72 180 top
R53  TRIMPOTSMD  [TRIMPOT-3MM]  53.09,57.91 270 top
R54  TRIMPOTSMD  [TRIMPOT-3MM]  53.09,65.53 270 top
R55  47K  [0402-RES]  59.44,61.72 270 top
R56  1K  [0402-RES]  53.09,61.72 180 top
R57  TRIMPOTSMD  [TRIMPOT-3MM]  82.8,57.91 270 top
R58  TRIMPOTSMD  [TRIMPOT-3MM]  82.8,65.53 270 top
R59  47K  [0402-RES]  89.15,61.72 270 top
R60  1K  [0402-RES]  82.8,61.72 180 top
R61  TRIMPOTSMD  [TRIMPOT-3MM]  112.52,57.91 270 top
R62  TRIMPOTSMD  [TRIMPOT-3MM]  112.52,65.53 270 top
R63  47K  [0402-RES]  118.87,61.72 270 top
R64  1K  [0402-RES]  112.52,61.72 180 top
R65  TRIMPOTSMD  [TRIMPOT-3MM]  23.37,73.66 270 top
R66  TRIMPOTSMD  [TRIMPOT-3MM]  23.37,81.28 270 top
R67  47K  [0402-RES]  29.72,77.47 270 top
R68  1K  [0402-RES]  23.37,77.47 180 top
R69  TRIMPOTSMD  [TRIMPOT-3MM]  53.09,73.66 270 top
R70  TRIMPOTSMD  [TRIMPOT-3MM]  53.09,81.28 270 top
R71  47K  [0402-RES]  59.44,77.47 270 top
R72  1K  [0402-RES]  53.09,77.47 180 top
R73  TRIMPOTSMD  [TRIMPOT-3MM]  82.8,73.66 270 top
R74  TRIMPOTSMD  [TRIMPOT-3MM]  82.8,81.28 270 top
R75  47K  [0402-RES]  89.15,77.47 270 top
R76  1K  [0402-RES]  82.8,77.47 180 top
R77  TRIMPOTSMD  [TRIMPOT-3MM]  112.52,73.66 270 top
R78  TRIMPOTSMD  [TRIMPOT-3MM]  112.52,81.28 270 top
R79  47K  [0402-RES]  118.87,77.47 270 top
R80  1K  [0402-RES]  112.52,77.47 180 top
R81  TRIMPOTSMD  [TRIMPOT-3MM]  23.37,89.41 270 top
R82  TRIMPOTSMD  [TRIMPOT-3MM]  23.37,97.03 270 top
R83  47K  [0402-RES]  29.72,93.22 270 top
R84  1K  [0402-RES]  23.37,93.22 180 top
R85  TRIMPOTSMD  [TRIMPOT-3MM]  53.09,89.41 270 top
R86  TRIMPOTSMD  [TRIMPOT-3MM]  53.09,97.03 270 top
R87  47K  [0402-RES]  59.44,93.22 270 top
R88  1K  [0402-RES]  53.09,93.22 180 top
R89  TRIMPOTSMD  [TRIMPOT-3MM]  82.8,89.41 270 top
R90  TRIMPOTSMD  [TRIMPOT-3MM]  82.8,97.03 270 top
R91  47K  [0402-RES]  89.15,93.22 270 top
R92  1K  [0402-RES]  82.8,93.22 180 top
R93  TRIMPOTSMD  [TRIMPOT-3MM]  112.52,89.41 270 top
R94  TRIMPOTSMD  [TRIMPOT-3MM]  112.52,97.03 270 top
R95  47K  [0402-RES]  118.87,93.22 270 top
R96  1K  [0402-RES]  112.52,93.22 180 top
R97  TRIMPOTSMD  [TRIMPOT-3MM]  23.37,105.16 270 top
R98  TRIMPOTSMD  [TRIMPOT-3MM]  23.37,112.78 270 top
R99  47K  [0402-RES]  29.72,108.97 270 top
R100  1K  [0402-RES]  23.37,108.97 180 top
R101  TRIMPOTSMD  [TRIMPOT-3MM]  53.09,105.16 270 top
R102  TRIMPOTSMD  [TRIMPOT-3MM]  53.09,112.78 270 top
R103  47K  [0402-RES]  59.44,108.97 270 top
R104  1K  [0402-RES]  53.09,108.97 180 top
R105  TRIMPOTSMD  [TRIMPOT-3MM]  82.8,105.16 270 top
R106  TRIMPOTSMD  [TRIMPOT-3MM]  82.8,112.78 270 top
R107  47K  [0402-RES]  89.15,108.97 270 top
R108  1K  [0402-RES]  82.8,108.97 180 top
R109  TRIMPOTSMD  [TRIMPOT-3MM]  112.52,105.16 270 top
R110  TRIMPOTSMD  [TRIMPOT-3MM]  112.52,112.78 270 top
R111  47K  [0402-RES]  118.87,108.97 270 top
R112  1K  [0402-RES]  112.52,108.97 180 top
R113  TRIMPOTSMD  [TRIMPOT-3MM]  23.37,120.9 270 top
R114  TRIMPOTSMD  [TRIMPOT-3MM]  23.37,128.52 270 top
R115  47K  [0402-RES]  29.72,124.71 270 top
R116  1K  [0402-RES]  23.37,124.71 180 top
R117  TRIMPOTSMD  [TRIMPOT-3MM]  53.09,120.9 270 top
R118  TRIMPOTSMD  [TRIMPOT-3MM]  53.09,128.52 270 top
R119  47K  [0402-RES]  59.44,124.71 270 top
R120  1K  [0402-RES]  53.09,124.71 180 top
R121  TRIMPOTSMD  [TRIMPOT-3MM]  82.8,120.9 270 top
R122  TRIMPOTSMD  [TRIMPOT-3MM]  82.8,128.52 270 top
R123  47K  [0402-RES]  89.15,124.71 270 top
R124  1K  [0402-RES]  82.8,124.71 180 top
R125  TRIMPOTSMD  [TRIMPOT-3MM]  112.52,120.9 270 top
R126  TRIMPOTSMD  [TRIMPOT-3MM]  112.52,128.52 270 top
R127  47K  [0402-RES]  118.87,124.71 270 top
R128  1K  [0402-RES]  112.52,124.71 180 top
R129  TRIMPOTSMD  [TRIMPOT-3MM]  23.37,136.65 270 top
R130  TRIMPOTSMD  [TRIMPOT-3MM]  23.37,144.27 270 top
R131  47K  [0402-RES]  29.72,140.46 270 top
R132  1K  [0402-RES]  23.37,140.46 180 top
R133  TRIMPOTSMD  [TRIMPOT-3MM]  53.09,136.65 270 top
R134  TRIMPOTSMD  [TRIMPOT-3MM]  53.09,144.27 270 top
R135  47K  [0402-RES]  59.44,140.46 270 top
R136  1K  [0402-RES]  53.09,140.46 180 top
R137  TRIMPOTSMD  [TRIMPOT-3MM]  82.8,136.65 270 top
R138  TRIMPOTSMD  [TRIMPOT-3MM]  82.8,144.27 270 top
R139  47K  [0402-RES]  89.15,140.46 270 top
R140  1K  [0402-RES]  82.8,140.46 180 top
R141  TRIMPOTSMD  [TRIMPOT-3MM]  112.52,136.65 270 top
R142  TRIMPOTSMD  [TRIMPOT-3MM]  112.52,144.27 270 top
R143  47K  [0402-RES]  118.87,140.46 270 top
R144  1K  [0402-RES]  112.52,140.46 180 top
R145  TRIMPOTSMD  [TRIMPOT-3MM]  23.37,152.4 270 top
R146  TRIMPOTSMD  [TRIMPOT-3MM]  23.37,160.02 270 top
R147  47K  [0402-RES]  29.72,156.21 270 top
R148  1K  [0402-RES]  23.37,156.21 180 top
R149  TRIMPOTSMD  [TRIMPOT-3MM]  53.09,152.4 270 top
R150  TRIMPOTSMD  [TRIMPOT-3MM]  53.09,160.02 270 top
R151  47K  [0402-RES]  59.44,156.21 270 top
R152  1K  [0402-RES]  53.09,156.21 180 top
R153  TRIMPOTSMD  [TRIMPOT-3MM]  82.8,152.4 270 top
R154  TRIMPOTSMD  [TRIMPOT-3MM]  82.8,160.02 270 top
R155  47K  [0402-RES]  89.15,156.21 270 top
R156  1K  [0402-RES]  82.8,156.21 180 top
R157  TRIMPOTSMD  [TRIMPOT-3MM]  112.52,152.4 270 top
R158  TRIMPOTSMD  [TRIMPOT-3MM]  112.52,160.02 270 top
R159  47K  [0402-RES]  118.87,156.21 270 top
R160  1K  [0402-RES]  112.52,156.21 180 top
R161  TRIMPOTSMD  [TRIMPOT-3MM]  23.37,168.15 270 top
R162  TRIMPOTSMD  [TRIMPOT-3MM]  23.37,175.77 270 top
R163  47K  [0402-RES]  29.72,171.96 270 top
R164  1K  [0402-RES]  23.37,171.96 180 top
R165  TRIMPOTSMD  [TRIMPOT-3MM]  53.09,168.15 270 top
R166  TRIMPOTSMD  [TRIMPOT-3MM]  53.09,175.77 270 top
R167  47K  [0402-RES]  59.44,171.96 270 top
R168  1K  [0402-RES]  53.09,171.96 180 top
R169  TRIMPOTSMD  [TRIMPOT-3MM]  82.8,168.15 270 top
R170  TRIMPOTSMD  [TRIMPOT-3MM]  82.8,175.77 270 top
R171  47K  [0402-RES]  89.15,171.96 270 top
R172  1K  [0402-RES]  82.8,171.96 180 top
R173  TRIMPOTSMD  [TRIMPOT-3MM]  112.52,168.15 270 top
R174  TRIMPOTSMD  [TRIMPOT-3MM]  112.52,175.77 270 top
R175  47K  [0402-RES]  118.87,171.96 270 top
R176  1K  [0402-RES]  112.52,171.96 180 top
R177  TRIMPOTSMD  [TRIMPOT-3MM]  23.37,183.9 270 top
R178  TRIMPOTSMD  [TRIMPOT-3MM]  23.37,191.52 270 top
R179  47K  [0402-RES]  29.72,187.71 270 top
R180  1K  [0402-RES]  23.37,187.71 180 top
R181  TRIMPOTSMD  [TRIMPOT-3MM]  53.09,183.9 270 top
R182  TRIMPOTSMD  [TRIMPOT-3MM]  53.09,191.52 270 top
R183  47K  [0402-RES]  59.44,187.71 270 top
R184  1K  [0402-RES]  53.09,187.71 180 top
R185  TRIMPOTSMD  [TRIMPOT-3MM]  82.8,183.9 270 top
R186  TRIMPOTSMD  [TRIMPOT-3MM]  82.8,191.52 270 top
R187  47K  [0402-RES]  89.15,187.71 270 top
R188  1K  [0402-RES]  82.8,187.71 180 top
R189  TRIMPOTSMD  [TRIMPOT-3MM]  112.52,183.9 270 top
R190  TRIMPOTSMD  [TRIMPOT-3MM]  112.52,191.52 270 top
R191  47K  [0402-RES]  118.87,187.71 270 top
R192  1K  [0402-RES]  112.52,187.71 180 top
R193  TRIMPOTSMD  [TRIMPOT-3MM]  23.37,199.64 270 top
R194  TRIMPOTSMD  [TRIMPOT-3MM]  23.37,207.26 270 top
R195  47K  [0402-RES]  29.72,203.45 270 top
R196  1K  [0402-RES]  23.37,203.45 180 top
R197  TRIMPOTSMD  [TRIMPOT-3MM]  53.09,199.64 270 top
R198  TRIMPOTSMD  [TRIMPOT-3MM]  53.09,207.26 270 top
R199  47K  [0402-RES]  59.44,203.45 270 top
R200  1K  [0402-RES]  53.09,203.45 180 top
R201  TRIMPOTSMD  [TRIMPOT-3MM]  82.8,199.64 270 top
R202  TRIMPOTSMD  [TRIMPOT-3MM]  82.8,207.26 270 top
R203  47K  [0402-RES]  89.15,203.45 270 top
R204  1K  [0402-RES]  82.8,203.45 180 top
R205  TRIMPOTSMD  [TRIMPOT-3MM]  112.52,199.64 270 top
R206  TRIMPOTSMD  [TRIMPOT-3MM]  112.52,207.26 270 top
R207  47K  [0402-RES]  118.87,203.45 270 top
R208  1K  [0402-RES]  112.52,203.45 180 top
R209  TRIMPOTSMD  [TRIMPOT-3MM]  23.37,215.39 270 top
R210  TRIMPOTSMD  [TRIMPOT-3MM]  23.37,223.01 270 top
R211  47K  [0402-RES]  29.72,219.2 270 top
R212  1K  [0402-RES]  23.37,219.2 180 top
R213  TRIMPOTSMD  [TRIMPOT-3MM]  53.09,215.39 270 top
R214  TRIMPOTSMD  [TRIMPOT-3MM]  53.09,223.01 270 top
R215  47K  [0402-RES]  59.44,219.2 270 top
R216  1K  [0402-RES]  53.09,219.2 180 top
R217  TRIMPOTSMD  [TRIMPOT-3MM]  82.8,215.39 270 top
R218  TRIMPOTSMD  [TRIMPOT-3MM]  82.8,223.01 270 top
R219  47K  [0402-RES]  89.15,219.2 270 top
R220  1K  [0402-RES]  82.8,219.2 180 top
R221  TRIMPOTSMD  [TRIMPOT-3MM]  112.52,215.39 270 top
R222  TRIMPOTSMD  [TRIMPOT-3MM]  112.52,223.01 270 top
R223  47K  [0402-RES]  118.87,219.2 270 top
R224  1K  [0402-RES]  112.52,219.2 180 top
U1  ACS712  [SO08]  17.02,14.48 270 top
U2  OPA344  [SOT23-5]  27.18,14.48 180 top
U3  ACS712  [SO08]  46.74,14.48 270 top
U4  OPA344  [SOT23-5]  56.9,14.48 180 top
U5  ACS712  [SO08]  76.45,14.48 270 top
U6  OPA344  [SOT23-5]  86.61,14.48 180 top
U7  ACS712  [SO08]  106.17,14.48 270 top
U8  OPA344  [SOT23-5]  116.33,14.48 180 top
U9  ACS712  [SO08]  17.02,30.23 270 top
U10  OPA344  [SOT23-5]  27.18,30.23 180 top
U11  ACS712  [SO08]  46.74,30.23 270 top
U12  OPA344  [SOT23-5]  56.9,30.23 180 top
U13  ACS712  [SO08]  76.45,30.23 270 top
U14  OPA344  [SOT23-5]  86.61,30.23 180 top
U15  ACS712  [SO08]  106.17,30.23 270 top
U16  OPA344  [SOT23-5]  116.33,30.23 180 top
U17  ACS712  [SO08]  17.02,45.97 270 top
U18  OPA344  [SOT23-5]  27.18,45.97 180 top
U19  ACS712  [SO08]  46.74,45.97 270 top
U20  OPA344  [SOT23-5]  56.9,45.97 180 top
U21  ACS712  [SO08]  76.45,45.97 270 top
U22  OPA344  [SOT23-5]  86.61,45.97 180 top
U23  ACS712  [SO08]  106.17,45.97 270 top
U24  OPA344  [SOT23-5]  116.33,45.97 180 top
U25  ACS712  [SO08]  17.02,61.72 270 top
U26  OPA344  [SOT23-5]  27.18,61.72 180 top
U27  ACS712  [SO08]  46.74,61.72 270 top
U28  OPA344  [SOT23-5]  56.9,61.72 180 top
U29  ACS712  [SO08]  76.45,61.72 270 top
U30  OPA344  [SOT23-5]  86.61,61.72 180 top
U31  ACS712  [SO08]  106.17,61.72 270 top
U32  OPA344  [SOT23-5]  116.33,61.72 180 top
U33  ACS712  [SO08]  17.02,77.47 270 top
U34  OPA344  [SOT23-5]  27.18,77.47 180 top
U35  ACS712  [SO08]  46.74,77.47 270 top
U36  OPA344  [SOT23-5]  56.9,77.47 180 top
U37  ACS712  [SO08]  76.45,77.47 270 top
U38  OPA344  [SOT23-5]  86.61,77.47 180 top
U39  ACS712  [SO08]  106.17,77.47 270 top
U40  OPA344  [SOT23-5]  116.33,77.47 180 top
U41  ACS712  [SO08]  17.02,93.22 270 top
U42  OPA344  [SOT23-5]  27.18,93.22 180 top
U43  ACS712  [SO08]  46.74,93.22 270 top
U44  OPA344  [SOT23-5]  56.9,93.22 180 top
U45  ACS712  [SO08]  76.45,93.22 270 top
U46  OPA344  [SOT23-5]  86.61,93.22 180 top
U47  ACS712  [SO08]  106.17,93.22 270 top
U48  OPA344  [SOT23-5]  116.33,93.22 180 top
U49  ACS712  [SO08]  17.02,108.97 270 top
U50  OPA344  [SOT23-5]  27.18,108.97 180 top
U51  ACS712  [SO08]  46.74,108.97 270 top
U52  OPA344  [SOT23-5]  56.9,108.97 180 top
U53  ACS712  [SO08]  76.45,108.97 270 top
U54  OPA344  [SOT23-5]  86.61,108.97 180 top
U55  ACS712  [SO08]  106.17,108.97 270 top
U56  OPA344  [SOT23-5]  116.33,108.97 180 top
U57  ACS712  [SO08]  17.02,124.71 270 top
U58  OPA344  [SOT23-5]  27.18,124.71 180 top
U59  ACS712  [SO08]  46.74,124.71 270 top
U60  OPA344  [SOT23-5]  56.9,124.71 180 top
U61  ACS712  [SO08]  76.45,124.71 270 top
U62  OPA344  [SOT23-5]  86.61,124.71 180 top
U63  ACS712  [SO08]  106.17,124.71 270 top
U64  OPA344  [SOT23-5]  116.33,124.71 180 top
U65  ACS712  [SO08]  17.02,140.46 270 top
U66  OPA344  [SOT23-5]  27.18,140.46 180 top
U67  ACS712  [SO08]  46.74,140.46 270 top
U68  OPA344  [SOT23-5]  56.9,140.46 180 top
U69  ACS712  [SO08]  76.45,140.46 270 top
U70  OPA344  [SOT23-5]  86.61,140.46 180 top
U71  ACS712  [SO08]  106.17,140.46 270 top
U72  OPA344  [SOT23-5]  116.33,140.46 180 top
U73  ACS712  [SO08]  17.02,156.21 270 top
U74  OPA344  [SOT23-5]  27.18,156.21 180 top
U75  ACS712  [SO08]  46.74,156.21 270 top
U76  OPA344  [SOT23-5]  56.9,156.21 180 top
U77  ACS712  [SO08]  76.45,156.21 270 top
U78  OPA344  [SOT23-5]  86.61,156.21 180 top
U79  ACS712  [SO08]  106.17,156.21 270 top
U80  OPA344  [SOT23-5]  116.33,156.21 180 top
U81  ACS712  [SO08]  17.02,171.96 270 top
U82  OPA344  [SOT23-5]  27.18,171.96 180 top
U83  ACS712  [SO08]  46.74,171.96 270 top
U84  OPA344  [SOT23-5]  56.9,171.96 180 top
U85  ACS712  [SO08]  76.45,171.96 270 top
U86  OPA344  [SOT23-5]  86.61,171.96 180 top
U87  ACS712  [SO08]  106.17,171.96 270 top
U88  OPA344  [SOT23-5]  116.33,171.96 180 top
U89  ACS712  [SO08]  17.02,187.71 270 top
U90  OPA344  [SOT23-5]  27.18,187.71 180 top
U91  ACS712  [SO08]  46.74,187.71 270 top
U92  OPA344  [SOT23-5]  56.9,187.71 180 top
U93  ACS712  [SO08]  76.45,187.71 270 top
U94  OPA344  [SOT23-5]  86.61,187.71 180 top
U95  ACS712  [SO08]  106.17,187.71 270 top
U96  OPA344  [SOT23-5]  116.33,187.71 180 top
U97  ACS712  [SO08]  17.02,203.45 270 top
U98  OPA344  [SOT23-5]  27.18,203.45 180 top
U99  ACS712  [SO08]  46.74,203.45 270 top
U100  OPA344  [SOT23-5]  56.9,203.45 180 top
U101  ACS712  [SO08]  76.45,203.45 270 top
U102  OPA344  [SOT23-5]  86.61,203.45 180 top
U103  ACS712  [SO08]  106.17,203.45 270 top
U104  OPA344  [SOT23-5]  116.33,203.45 180 top
U105  ACS712  [SO08]  17.02,219.2 270 top
U106  OPA344  [SOT23-5]  27.18,219.2 180 top
U107  ACS712  [SO08]  46.74,219.2 270 top
U108  OPA344  [SOT23-5]  56.9,219.2 180 top
U109  ACS712  [SO08]  76.45,219.2 270 top
U110  OPA344  [SOT23-5]  86.61,219.2 180 top
U111  ACS712  [SO08]  106.17,219.2 270 top
U112  OPA344  [SOT23-5]  116.33,219.2 180 top
U$1  FIDUCIALUFIDUCIAL  [MICRO-FIDUCIAL]  34.8,20.83 0 top
U$2  LOGO-SFENEW  [SFE-NEW-WEBLOGO]  31.75,14.48 0 bottom
U$3  FIDUCIALUFIDUCIAL  [MICRO-FIDUCIAL]  13.21,8.13 0 top
U$4  LOGO-SFENEW  [SFE-NEW-WEBLOGO]  61.47,14.48 0 bottom
U$5  FIDUCIALUFIDUCIAL  [MICRO-FIDUCIAL]  64.52,20.83 0 top
U$6  FIDUCIALUFIDUCIAL  [MICRO-FIDUCIAL]  42.93,8.13 0 top
U$7  LOGO-SFENEW  [SFE-NEW-WEBLOGO]  91.19,14.48 0 bottom
U$8  FIDUCIALUFIDUCIAL  [MICRO-FIDUCIAL]  94.23,20.83 0 top
U$9  FIDUCIALUFIDUCIAL  [MICRO-FIDUCIAL]  72.64,8.13 0 top
U$10  LOGO-SFENEW  [SFE-NEW-WEBLOGO]  120.9,14.48 0 bottom
U$11  FIDUCIALUFIDUCIAL  [MICRO-FIDUCIAL]  123.95,20.83 0 top
U$12  FIDUCIALUFIDUCIAL  [MICRO-FIDUCIAL]  102.36,8.13 0 top
U$13  LOGO-SFENEW  [SFE-NEW-WEBLOGO]  31.75,30.23 0 bottom
U$14  FIDUCIALUFIDUCIAL  [MICRO-FIDUCIAL]  34.8,36.58 0 top
U$15  FIDUCIALUFIDUCIAL  [MICRO-FIDUCIAL]  13.21,23.88 0 top
U$16  LOGO-SFENEW  [SFE-NEW-WEBLOGO]  61.47,30.23 0 bottom
U$17  FIDUCIALUFIDUCIAL  [MICRO-FIDUCIAL]  64.52,36.58 0 top
U$18  FIDUCIALUFIDUCIAL  [MICRO-FIDUCIAL]  42.93,23.88 0 top
U$19  LOGO-SFENEW  [SFE-NEW-WEBLOGO]  91.19,30.23 0 bottom
U$20  FIDUCIALUFIDUCIAL  [MICRO-FIDUCIAL]  94.23,36.58 0 top
U$21  FIDUCIALUFIDUCIAL  [MICRO-FIDUCIAL]  72.64,23.88 0 top
U$22  LOGO-SFENEW  [SFE-NEW-WEBLOGO]  120.9,30.23 0 bottom
U$23  FIDUCIALUFIDUCIAL  [MICRO-FIDUCIAL]  123.95,36.58 0 top
U$24  FIDUCIALUFIDUCIAL  [MICRO-FIDUCIAL]  102.36,23.88 0 top
U$25  LOGO-SFENEW  [SFE-NEW-WEBLOGO]  31.75,45.97 0 bottom
U$26  FIDUCIALUFIDUCIAL  [MICRO-FIDUCIAL]  34.8,52.32 0 top
U$27  FIDUCIALUFIDUCIAL  [MICRO-FIDUCIAL]  13.21,39.62 0 top
U$28  LOGO-SFENEW  [SFE-NEW-WEBLOGO]  61.47,45.97 0 bottom
U$29  FIDUCIALUFIDUCIAL  [MICRO-FIDUCIAL]  64.52,52.32 0 top
U$30  FIDUCIALUFIDUCIAL  [MICRO-FIDUCIAL]  42.93,39.62 0 top
U$31  LOGO-SFENEW  [SFE-NEW-WEBLOGO]  91.19,45.97 0 bottom
U$32  FIDUCIALUFIDUCIAL  [MICRO-FIDUCIAL]  94.23,52.32 0 top
U$33  FIDUCIALUFIDUCIAL  [MICRO-FIDUCIAL]  72.64,39.62 0 top
U$34  LOGO-SFENEW  [SFE-NEW-WEBLOGO]  120.9,45.97 0 bottom
U$35  FIDUCIALUFIDUCIAL  [MICRO-FIDUCIAL]  123.95,52.32 0 top
U$36  FIDUCIALUFIDUCIAL  [MICRO-FIDUCIAL]  102.36,39.62 0 top
U$37  LOGO-SFENEW  [SFE-NEW-WEBLOGO]  31.75,61.72 0 bottom
U$38  FIDUCIALUFIDUCIAL  [MICRO-FIDUCIAL]  34.8,68.07 0 top
U$39  FIDUCIALUFIDUCIAL  [MICRO-FIDUCIAL]  13.21,55.37 0 top
U$40  LOGO-SFENEW  [SFE-NEW-WEBLOGO]  61.47,61.72 0 bottom
U$41  FIDUCIALUFIDUCIAL  [MICRO-FIDUCIAL]  64.52,68.07 0 top
U$42  FIDUCIALUFIDUCIAL  [MICRO-FIDUCIAL]  42.93,55.37 0 top
U$43  LOGO-SFENEW  [SFE-NEW-WEBLOGO]  91.19,61.72 0 bottom
U$44  FIDUCIALUFIDUCIAL  [MICRO-FIDUCIAL]  94.23,68.07 0 top
U$45  FIDUCIALUFIDUCIAL  [MICRO-FIDUCIAL]  72.64,55.37 0 top
U$46  LOGO-SFENEW  [SFE-NEW-WEBLOGO]  120.9,61.72 0 bottom
U$47  FIDUCIALUFIDUCIAL  [MICRO-FIDUCIAL]  123.95,68.07 0 top
U$48  FIDUCIALUFIDUCIAL  [MICRO-FIDUCIAL]  102.36,55.37 0 top
U$49  LOGO-SFENEW  [SFE-NEW-WEBLOGO]  31.75,77.47 0 bottom
U$50  FIDUCIALUFIDUCIAL  [MICRO-FIDUCIAL]  34.8,83.82 0 top
U$51  FIDUCIALUFIDUCIAL  [MICRO-FIDUCIAL]  13.21,71.12 0 top
U$52  LOGO-SFENEW  [SFE-NEW-WEBLOGO]  61.47,77.47 0 bottom
U$53  FIDUCIALUFIDUCIAL  [MICRO-FIDUCIAL]  64.52,83.82 0 top
U$54  FIDUCIALUFIDUCIAL  [MICRO-FIDUCIAL]  42.93,71.12 0 top
U$55  LOGO-SFENEW  [SFE-NEW-WEBLOGO]  91.19,77.47 0 bottom
U$56  FIDUCIALUFIDUCIAL  [MICRO-FIDUCIAL]  94.23,83.82 0 top
U$57  FIDUCIALUFIDUCIAL  [MICRO-FIDUCIAL]  72.64,71.12 0 top
U$58  LOGO-SFENEW  [SFE-NEW-WEBLOGO]  120.9,77.47 0 bottom
U$59  FIDUCIALUFIDUCIAL  [MICRO-FIDUCIAL]  123.95,83.82 0 top
U$60  FIDUCIALUFIDUCIAL  [MICRO-FIDUCIAL]  102.36,71.12 0 top
U$61  LOGO-SFENEW  [SFE-NEW-WEBLOGO]  31.75,93.22 0 bottom
U$62  FIDUCIALUFIDUCIAL  [MICRO-FIDUCIAL]  34.8,99.57 0 top
U$63  FIDUCIALUFIDUCIAL  [MICRO-FIDUCIAL]  13.21,86.87 0 top
U$64  LOGO-SFENEW  [SFE-NEW-WEBLOGO]  61.47,93.22 0 bottom
U$65  FIDUCIALUFIDUCIAL  [MICRO-FIDUCIAL]  64.52,99.57 0 top
U$66  FIDUCIALUFIDUCIAL  [MICRO-FIDUCIAL]  42.93,86.87 0 top
U$67  LOGO-SFENEW  [SFE-NEW-WEBLOGO]  91.19,93.22 0 bottom
U$68  FIDUCIALUFIDUCIAL  [MICRO-FIDUCIAL]  94.23,99.57 0 top
U$69  FIDUCIALUFIDUCIAL  [MICRO-FIDUCIAL]  72.64,86.87 0 top
U$70  LOGO-SFENEW  [SFE-NEW-WEBLOGO]  120.9,93.22 0 bottom
U$71  FIDUCIALUFIDUCIAL  [MICRO-FIDUCIAL]  123.95,99.57 0 top
U$72  FIDUCIALUFIDUCIAL  [MICRO-FIDUCIAL]  102.36,86.87 0 top
U$73  LOGO-SFENEW  [SFE-NEW-WEBLOGO]  31.75,108.97 0 bottom
U$74  FIDUCIALUFIDUCIAL  [MICRO-FIDUCIAL]  34.8,115.32 0 top
U$75  FIDUCIALUFIDUCIAL  [MICRO-FIDUCIAL]  13.21,102.62 0 top
U$76  LOGO-SFENEW  [SFE-NEW-WEBLOGO]  61.47,108.97 0 bottom
U$77  FIDUCIALUFIDUCIAL  [MICRO-FIDUCIAL]  64.52,115.32 0 top
U$78  FIDUCIALUFIDUCIAL  [MICRO-FIDUCIAL]  42.93,102.62 0 top
U$79  LOGO-SFENEW  [SFE-NEW-WEBLOGO]  91.19,108.97 0 bottom
U$80  FIDUCIALUFIDUCIAL  [MICRO-FIDUCIAL]  94.23,115.32 0 top
U$81  FIDUCIALUFIDUCIAL  [MICRO-FIDUCIAL]  72.64,102.62 0 top
U$82  LOGO-SFENEW  [SFE-NEW-WEBLOGO]  120.9,108.97 0 bottom
U$83  FIDUCIALUFIDUCIAL  [MICRO-FIDUCIAL]  123.95,115.32 0 top
U$84  FIDUCIALUFIDUCIAL  [MICRO-FIDUCIAL]  102.36,102.62 0 top
U$85  LOGO-SFENEW  [SFE-NEW-WEBLOGO]  31.75,124.71 0 bottom
U$86  FIDUCIALUFIDUCIAL  [MICRO-FIDUCIAL]  34.8,131.06 0 top
U$87  FIDUCIALUFIDUCIAL  [MICRO-FIDUCIAL]  13.21,118.36 0 top
U$88  LOGO-SFENEW  [SFE-NEW-WEBLOGO]  61.47,124.71 0 bottom
U$89  FIDUCIALUFIDUCIAL  [MICRO-FIDUCIAL]  64.52,131.06 0 top
U$90  FIDUCIALUFIDUCIAL  [MICRO-FIDUCIAL]  42.93,118.36 0 top
U$91  LOGO-SFENEW  [SFE-NEW-WEBLOGO]  91.19,124.71 0 bottom
U$92  FIDUCIALUFIDUCIAL  [MICRO-FIDUCIAL]  94.23,131.06 0 top
U$93  FIDUCIALUFIDUCIAL  [MICRO-FIDUCIAL]  72.64,118.36 0 top
U$94  LOGO-SFENEW  [SFE-NEW-WEBLOGO]  120.9,124.71 0 bottom
U$95  FIDUCIALUFIDUCIAL  [MICRO-FIDUCIAL]  123.95,131.06 0 top
U$96  FIDUCIALUFIDUCIAL  [MICRO-FIDUCIAL]  102.36,118.36 0 top
U$97  LOGO-SFENEW  [SFE-NEW-WEBLOGO]  31.75,140.46 0 bottom
U$98  FIDUCIALUFIDUCIAL  [MICRO-FIDUCIAL]  34.8,146.81 0 top
U$99  FIDUCIALUFIDUCIAL  [MICRO-FIDUCIAL]  13.21,134.11 0 top
U$100  LOGO-SFENEW  [SFE-NEW-WEBLOGO]  61.47,140.46 0 bottom
U$101  FIDUCIALUFIDUCIAL  [MICRO-FIDUCIAL]  64.52,146.81 0 top
U$102  FIDUCIALUFIDUCIAL  [MICRO-FIDUCIAL]  42.93,134.11 0 top
U$103  LOGO-SFENEW  [SFE-NEW-WEBLOGO]  91.19,140.46 0 bottom
U$104  FIDUCIALUFIDUCIAL  [MICRO-FIDUCIAL]  94.23,146.81 0 top
U$105  FIDUCIALUFIDUCIAL  [MICRO-FIDUCIAL]  72.64,134.11 0 top
U$106  LOGO-SFENEW  [SFE-NEW-WEBLOGO]  120.9,140.46 0 bottom
U$107  FIDUCIALUFIDUCIAL  [MICRO-FIDUCIAL]  123.95,146.81 0 top
U$108  FIDUCIALUFIDUCIAL  [MICRO-FIDUCIAL]  102.36,134.11 0 top
U$109  LOGO-SFENEW  [SFE-NEW-WEBLOGO]  31.75,156.21 0 bottom
U$110  FIDUCIALUFIDUCIAL  [MICRO-FIDUCIAL]  34.8,162.56 0 top
U$111  FIDUCIALUFIDUCIAL  [MICRO-FIDUCIAL]  13.21,149.86 0 top
U$112  LOGO-SFENEW  [SFE-NEW-WEBLOGO]  61.47,156.21 0 bottom
U$113  FIDUCIALUFIDUCIAL  [MICRO-FIDUCIAL]  64.52,162.56 0 top
U$114  FIDUCIALUFIDUCIAL  [MICRO-FIDUCIAL]  42.93,149.86 0 top
U$115  LOGO-SFENEW  [SFE-NEW-WEBLOGO]  91.19,156.21 0 bottom
U$116  FIDUCIALUFIDUCIAL  [MICRO-FIDUCIAL]  94.23,162.56 0 top
U$117  FIDUCIALUFIDUCIAL  [MICRO-FIDUCIAL]  72.64,149.86 0 top
U$118  LOGO-SFENEW  [SFE-NEW-WEBLOGO]  120.9,156.21 0 bottom
U$119  FIDUCIALUFIDUCIAL  [MICRO-FIDUCIAL]  123.95,162.56 0 top
U$120  FIDUCIALUFIDUCIAL  [MICRO-FIDUCIAL]  102.36,149.86 0 top
U$121  LOGO-SFENEW  [SFE-NEW-WEBLOGO]  31.75,171.96 0 bottom
U$122  FIDUCIALUFIDUCIAL  [MICRO-FIDUCIAL]  34.8,178.31 0 top
U$123  FIDUCIALUFIDUCIAL  [MICRO-FIDUCIAL]  13.21,165.61 0 top
U$124  LOGO-SFENEW  [SFE-NEW-WEBLOGO]  61.47,171.96 0 bottom
U$125  FIDUCIALUFIDUCIAL  [MICRO-FIDUCIAL]  64.52,178.31 0 top
U$126  FIDUCIALUFIDUCIAL  [MICRO-FIDUCIAL]  42.93,165.61 0 top
U$127  LOGO-SFENEW  [SFE-NEW-WEBLOGO]  91.19,171.96 0 bottom
U$128  FIDUCIALUFIDUCIAL  [MICRO-FIDUCIAL]  94.23,178.31 0 top
U$129  FIDUCIALUFIDUCIAL  [MICRO-FIDUCIAL]  72.64,165.61 0 top
U$130  LOGO-SFENEW  [SFE-NEW-WEBLOGO]  120.9,171.96 0 bottom
U$131  FIDUCIALUFIDUCIAL  [MICRO-FIDUCIAL]  123.95,178.31 0 top
U$132  FIDUCIALUFIDUCIAL  [MICRO-FIDUCIAL]  102.36,165.61 0 top
U$133  LOGO-SFENEW  [SFE-NEW-WEBLOGO]  31.75,187.71 0 bottom
U$134  FIDUCIALUFIDUCIAL  [MICRO-FIDUCIAL]  34.8,194.06 0 top
U$135  FIDUCIALUFIDUCIAL  [MICRO-FIDUCIAL]  13.21,181.36 0 top
U$136  LOGO-SFENEW  [SFE-NEW-WEBLOGO]  61.47,187.71 0 bottom
U$137  FIDUCIALUFIDUCIAL  [MICRO-FIDUCIAL]  64.52,194.06 0 top
U$138  FIDUCIALUFIDUCIAL  [MICRO-FIDUCIAL]  42.93,181.36 0 top
U$139  LOGO-SFENEW  [SFE-NEW-WEBLOGO]  91.19,187.71 0 bottom